# EAGLE board frond.withname (EAGLE 7.2.0)
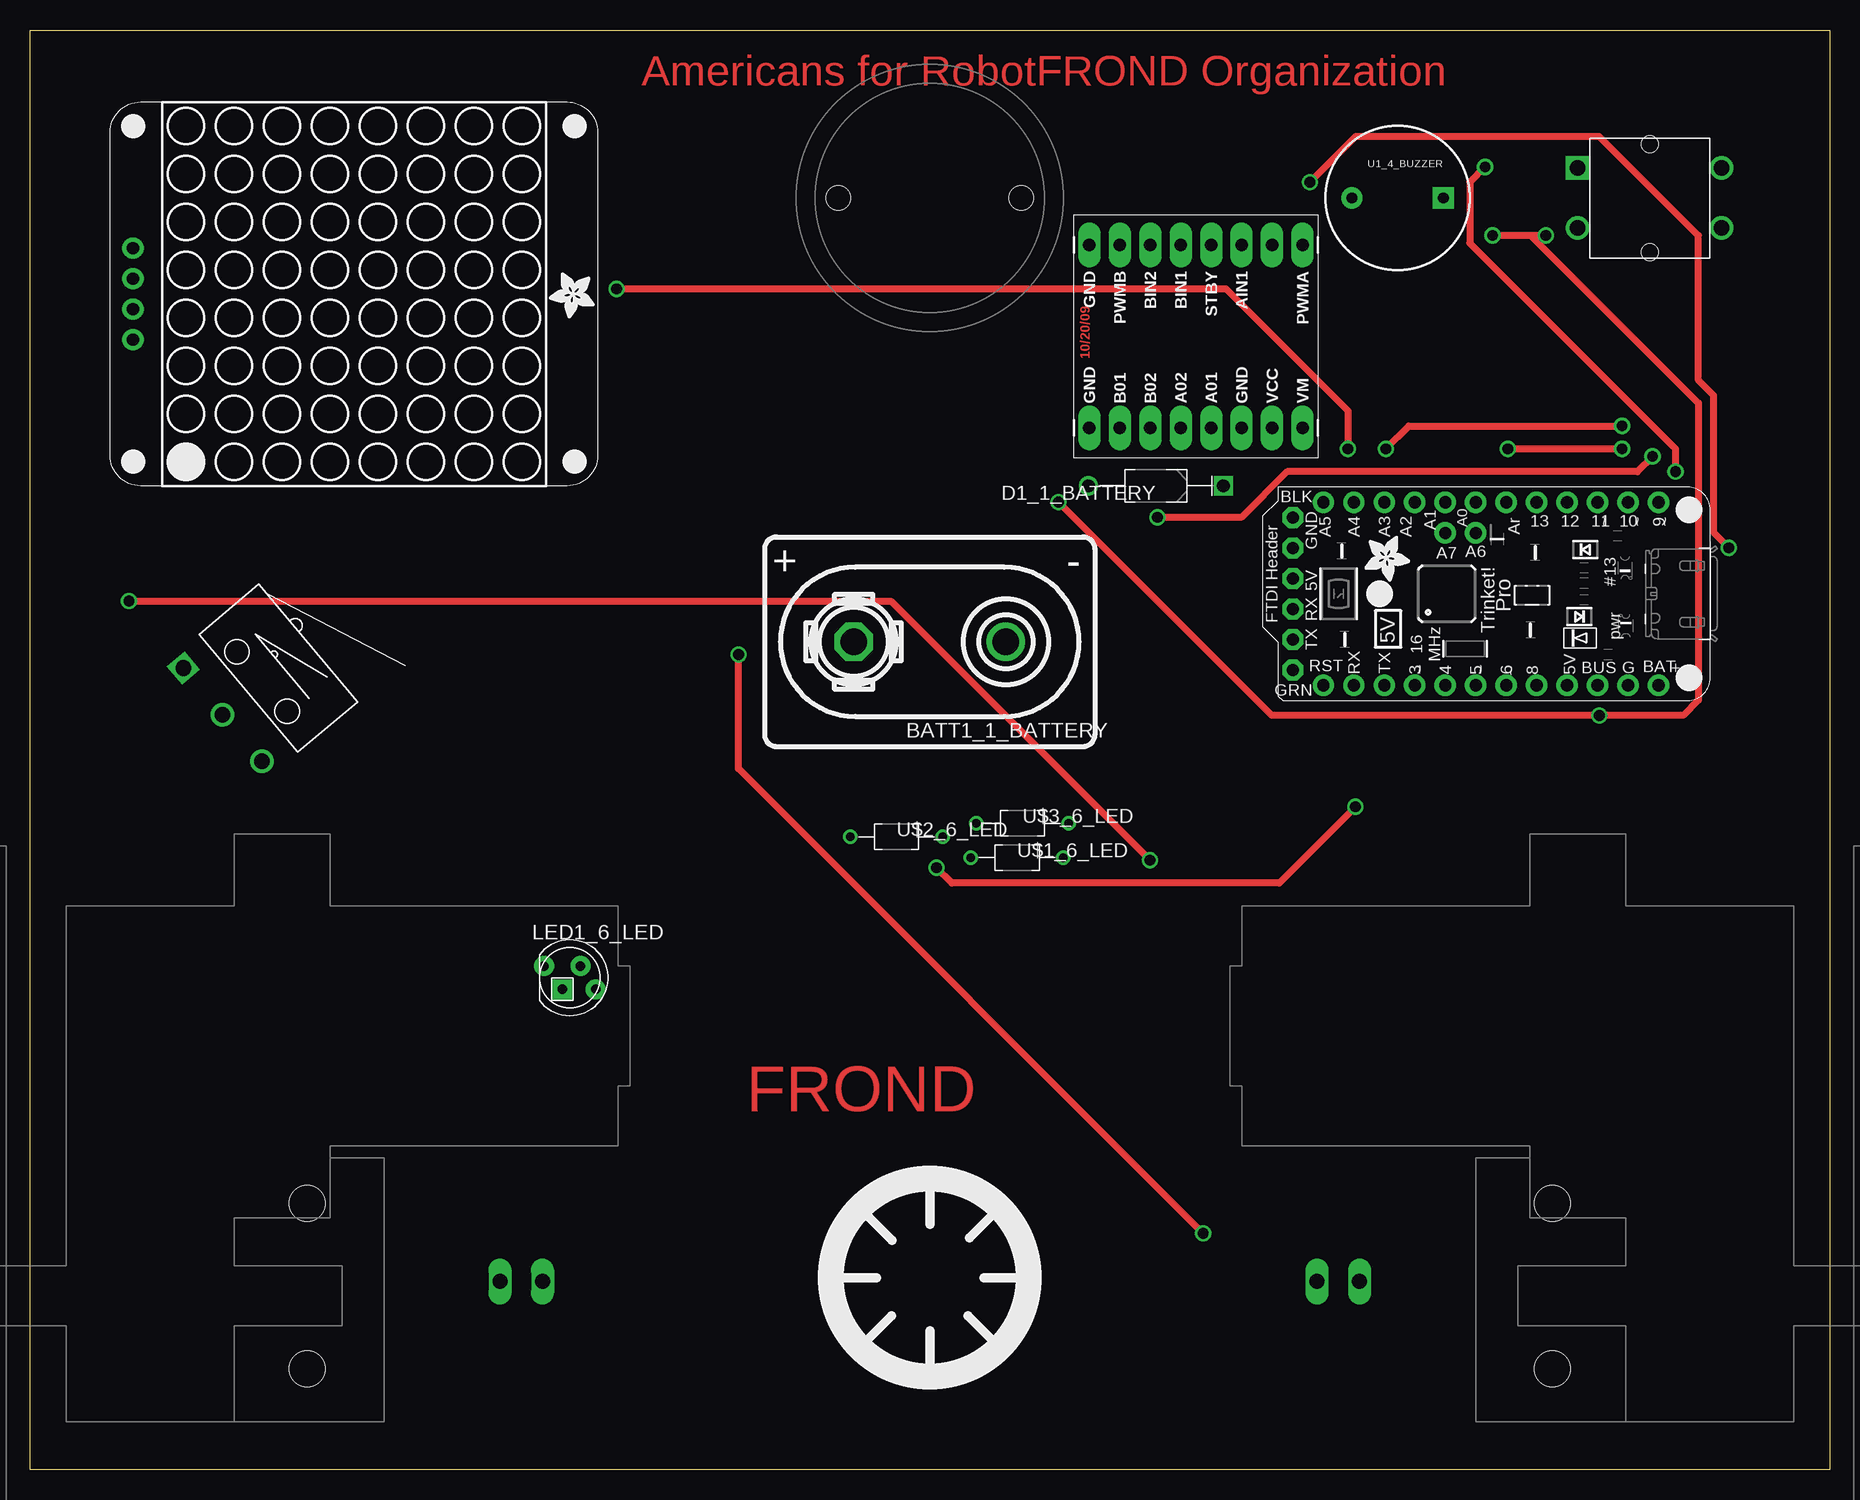
[diagram p0: board, top side]
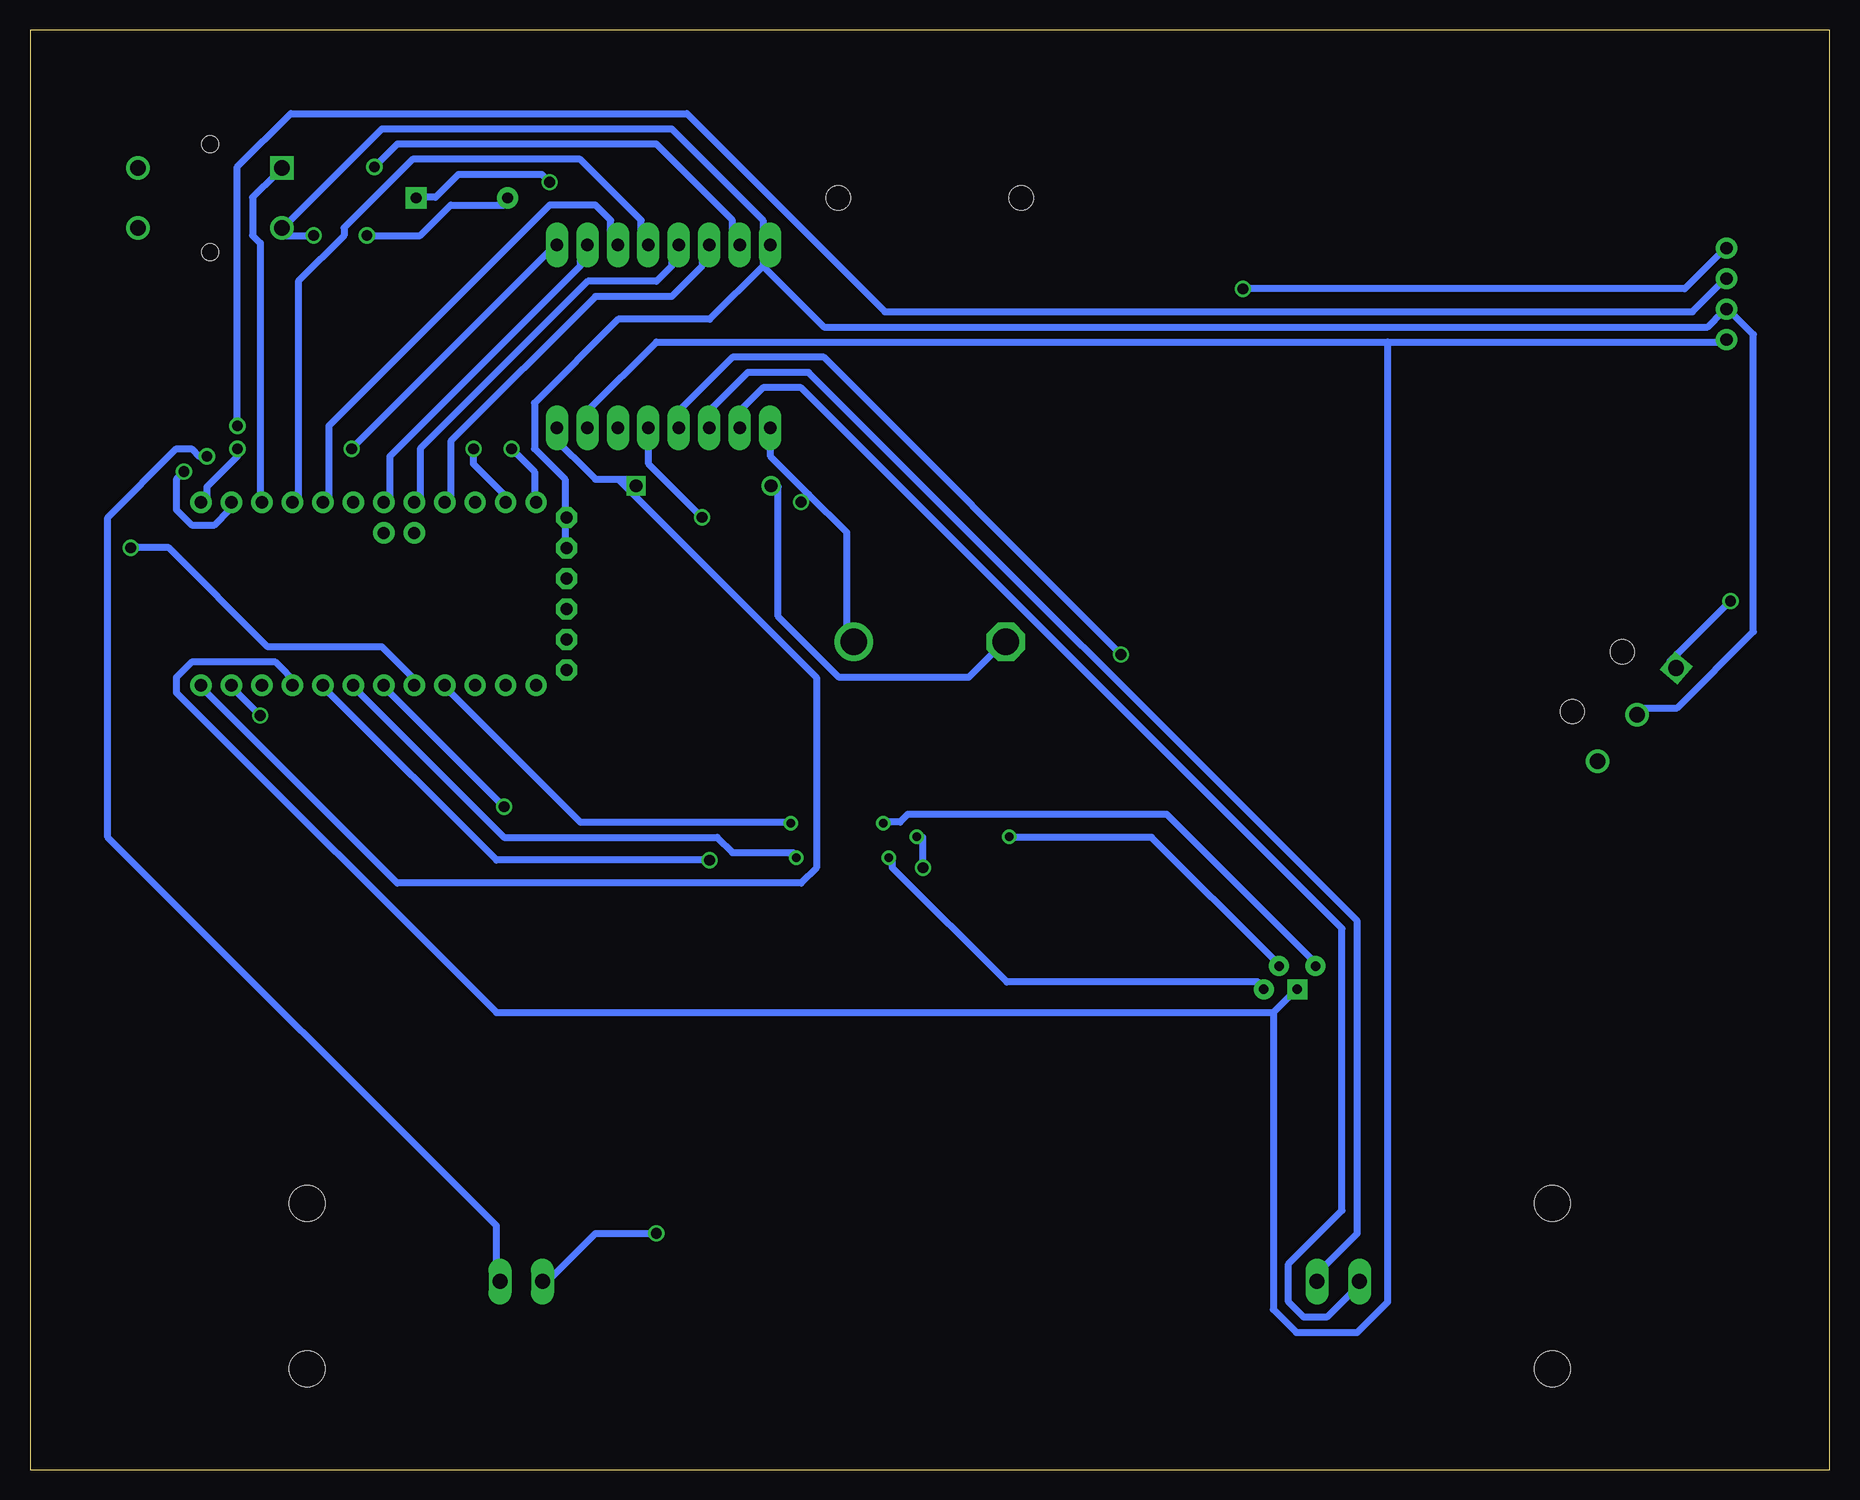
[diagram p1: board, bottom side, seen from below]

Size 150 x 120 mm. Coordinates in mm from the lower left corner, seen from the top.
Outline: 0,0 0,120 150,120 150,0 0,0
Copper layers (1*16): Top 0.035mm / dielectric 1.5mm / Bottom 0.035mm
Design rules "default": minimum track width 0.6mm, minimum drill 0.9mm, track to track 15mil, track to pad 0.6mm, pad to pad 0.5mm, via to via 0.38mm, smd to smd 8mil, copper to edge 40mil, drill to drill 8mil, minimum pad ring 10mil, minimum via ring 8mil, stop-mask expansion 4mil, vias tented up to drill 0mil, thermal gap 10mil
tRestrict: area 10.5,64.5 to 15.1,69.1; area 101.7,84.1 to 105.4,89.6; area 101.7,99.3 to 105.4,104.9; area 103.5,75 to 107.1,78.6; area 103.5,77.6 to 107.1,81.1; area 104.2,84.1 to 107.9,89.6; area 104.2,99.3 to 107.9,104.9; area 105.4,12.9 to 109.1,18.5; area 106,78.8 to 109.6,82.4; area 108.4,104.2 to 112,107.8; area 108.6,78.8 to 112.1,82.4; area 109,12.9 to 112.7,18.5; 51 more areas
vRestrict: area -10,-29 to 52,54.5; area 102.7,64.1 to 140.7,81.9; area 107.7,99.7 to 120.3,112.3; area 127.5,99 to 142.5,113; area 42,37.8 to 48.2,44.2; area 59.8,58.8 to 90.2,79.2; area 6,81.5 to 48,114.5; area 63.6,94.6 to 86.6,117.7; area 65.2,6.2 to 84.8,25.8; area 67.6,51.4 to 76.9,54.1; area 77.6,49.7 to 87,52.3; area 78.1,52.5 to 87.4,55.2; 4 more areas

## Footprints (pad centres in the part's own frame; a part is rotated, then mirrored left to right if it is on the bottom)
BUTTON-TACTILE-SQUARE-ADAFRUIT1010 = drill 1.3 square: P -6,2.5 | drill 1.3: P2 6,2.5; S -6,-2.5; S2 6,-2.5 | hole 1.4: 0,-4.5; 0,4.5
BATTERY_9V_KEYSTONE_968 = drill 2.2: N 6.35,0 | drill 2.2 octagon: P -6.35,0
DIOAD1125W78L520D270_HS = drill 1.06 pad 1.59: A 5.625,0 | drill 1.06 pad 1.59 square: C -5.625,0
SPARKFUN_DUAL_MOTOR_DRIVER = drill 1.016 pad 1.88 long: A01 7.62,1.27; A02 7.62,-1.27; AIN1 -7.62,3.81; AIN2 -7.62,6.35; B01 7.62,-6.35; B02 7.62,-3.81; BIN1 -7.62,-1.27; BIN2 -7.62,-3.81; GND -7.62,-8.89; GND1 7.62,3.81; GND2 7.62,-8.89; PWMA -7.62,8.89; PWMB -7.62,-6.35; STBY -7.62,1.27; VCC 7.62,6.35; VM 7.62,8.89
SOLARBOTICS_G2_LEFT = drill 1.27 long: + -41.18,-3.68; - -44.72,-3.68 | hole 3: -25.1,-10.2; -25.1,3.6
LED5MMRGB = drill 0.8 pad 1.676: 1 -2.159,0.968; 3 0.889,0.968; 4 2.159,-0.968 | drill 0.8 pad 1.676 square: 2 -0.635,-0.968
SOLARBOTICS_G2 = drill 1.27 long: + 41.18,-3.68; - 44.72,-3.68 | hole 3: 25.1,-10.2; 25.1,3.6
ADAFRUIT-PRO-TRINKET-5V = drill 1.016 pad 1.778: +5V 7.62,24.13; A0 -7.62,16.51; A1 -7.62,13.97; A2 -7.62,11.43; A3 -7.62,8.89; A4 -7.62,6.35; A5 -7.62,3.81; AREF -7.62,19.05; D3 7.62,11.43; D4 7.62,13.97; D5 7.62,16.51; D6 7.62,19.05; D8 7.62,21.59; D9 -7.62,31.75; D10 -7.62,29.21; D11 -7.62,26.67; D12 -7.62,24.13; D13 -7.62,21.59; GND2 7.62,29.21; RESET 7.62,3.81; RXD1 7.62,6.35; TXD1 7.62,8.89; VBAT 7.62,31.75; VBUS1 7.62,26.67 | drill 1 pad 1.778: A6 -5.08,16.51; A7 -5.08,13.97 | drill 1.016 pad 1.778 octagon: DTR/RTS 6.35,1.27; GND -6.35,1.27; GND1 -3.81,1.27; RXD 1.27,1.27; TXD 3.81,1.27; VBUS -1.27,1.27
ADAFRUIT-3/4IN-CASTER = hole 2: -7.62,0; 7.62,0
BUZZER-12MM = drill 0.9 pad 1.778 square: + 3.81,0 | drill 0.9 pad 1.778: - -3.81,0
ADAFRUIT-1.2IN-8X8-LED-BACKPACK = drill 1.016 pad 1.778: GND -18.415,-1.27; SCL -18.415,3.81; SDA -18.415,1.27; VDD -18.415,-3.81
RESAD770W45L370D210_HS = drill 0.7 pad 1.1: 1 -3.85,0; 2 3.85,0
BUMP_SWITCH_OMRON_D2FLA1 = drill 1.3 square: A -5.08,-2.8 | drill 1.3: B 0,-2.8; NC 5.08,-2.8 | hole 2: -3.25,1.5; 3.25,1.5

## Placement (x,y rotation side)
B1_7_BUTTON  BUTTON-TACTILE-SQUARE  [BUTTON-TACTILE-SQUARE-ADAFRUIT1010]  135,106 0 top
BATT1_1_BATTERY  BATTERY-9V-VERTICAL  [BATTERY_9V_KEYSTONE_968]  75,69 0 top
D1_1_BATTERY  [DIOAD1125W78L520D270_HS]  93.85,82 180 top
DRVR_9_DRIVE  SPARKFUN_DUAL_MOTOR_DRIVER-BOB  [SPARKFUN_DUAL_MOTOR_DRIVER]  97.19,94.46 270 top
L_9_DRIVE  SOLARBOTICS_GM2_LEFT  [SOLARBOTICS_G2_LEFT]  -2,12 180 top
LED1_6_LED  RGBLED_CA-5MM  [LED5MMRGB]  45,41 0 top
R_9_DRIVE  SOLARBOTICS_GM2  [SOLARBOTICS_G2]  152,12 180 top
U1_0_BRAIN  [ADAFRUIT-PRO-TRINKET-5V]  104,73 270 top
U1_2_CASTER  [ADAFRUIT-3/4IN-CASTER]  75,106 0 top
U1_3_PENHOLDER  [PENHOLDER]  75,16 0 top
U1_4_BUZZER  [BUZZER-12MM]  114,106 0 top
U1_8_DISPLAY_2  [ADAFRUIT-1.2IN-8X8-LED-BACKPACK]  27,98 0 top
U$1_6_LED  100  [RESAD770W45L370D210_HS]  82.28,51.01 0 top
U$2_5_BUMP  BUMP_SWITCH-MEDIUM-RIGHT  [BUMP_SWITCH_OMRON_D2FLA1]  18.2,64.72 310 top
U$2_6_LED  100  [RESAD770W45L370D210_HS]  72.23,52.75 0 top
U$3_6_LED  150  [RESAD770W45L370D210_HS]  82.73,53.87 0 top

## Library data of the parts
B1_7_BUTTON BATT1_1_BATTERY L_9_DRIVE R_9_DRIVE U1_2_CASTER U1_3_PENHOLDER U1_4_BUZZER U$2_5_BUMP = Components
D1_1_BATTERY = KoalaBuild; DATASHEET: http://www.st.com/web/en/resource/technical/document/datasheet/CD00001625.pdf; DB: /Users/sciencectn/Documents/nvsl/Gadgets/Tools/Koala/Koala/PartLibrary/Digikey/Schottky-Diodes-TH.csv; DEVICE: TH-DO-41-AND-DO-204AL; DIST: Digikey; DISTPN: 497-4547-1-ND; IMAGE: http://media.digikey.com/photos/STMicro%20Photos/1N5819.JPG; IRECT: 1A; MFR: STMicroelectronics; MIN_QTY: 1; MPN: 1N5817; PACKAGE: DIOAD1125W78L520D270_HS; PRICE: $0.57; SIZE: TH; STOCK: STOCK; VALUE: 450mV; VREV: 20V
DRVR_9_DRIVE U1_0_BRAIN U1_8_DISPLAY_2 = BOBs
LED1_6_LED = Components; CREATOR: Swanson
U$1_6_LED U$2_6_LED = KoalaBuild; CASE: TH; DATASHEET: http://www.yageo.com/NewPortal/yageodocoutput?fileName=/pdf/throughhole/Yageo_LR_CFR_2013.pdf; DB: /Users/sciencectn/Documents/nvsl/Gadgets/Tools/Koala/Koala/PartLibrary/Digikey/Resistors-TH.csv; DEVICE: TH-1/6W-CARBON; DIST: Digikey; DISTPN: 100EBK-ND; IMAGE: http://media.digikey.com/Renders/Yageo%20Renders/CFR-12JR-100R.jpg; MFR: Yageo; MIN_QTY: 1; MPN: CFR-12JB-52-100R; PACKAGE: RESAD770W45L370D210_HS; PRICE: $0.10; PWR: 167mW; SIZE: TH; STOCK: STOCK; TOL: 5%; VALUE_QUERY: 100
U$3_6_LED = KoalaBuild; CASE: TH; DATASHEET: http://www.yageo.com/NewPortal/yageodocoutput?fileName=/pdf/throughhole/Yageo_LR_CFR_2013.pdf; DB: /Users/sciencectn/Documents/nvsl/Gadgets/Tools/Koala/Koala/PartLibrary/Digikey/Resistors-TH.csv; DEVICE: TH-1/6W-CARBON; DIST: Digikey; DISTPN: 150EBK-ND; IMAGE: http://media.digikey.com/Renders/Yageo%20Renders/CFR-12JR-150R.jpg; MFR: Yageo; MIN_QTY: 1; MPN: CFR-12JB-52-150R; PACKAGE: RESAD770W45L370D210_HS; PRICE: $0.10; PWR: 167mW; SIZE: TH; STOCK: STOCK; TOL: 5%; VALUE_QUERY: 150

## Nets
+5V_0_BRAIN: DRVR_9_DRIVE.VCC LED1_6_LED.2 U1_0_BRAIN.+5V U1_8_DISPLAY_2.VDD
A0_0_BRAIN: DRVR_9_DRIVE.AIN2 U1_0_BRAIN.A0
A1_0_BRAIN: DRVR_9_DRIVE.BIN1 U1_0_BRAIN.A1
A01_9_DRIVE: DRVR_9_DRIVE.A01 R_9_DRIVE.+
A2_0_BRAIN: DRVR_9_DRIVE.BIN2 U1_0_BRAIN.A2
A02_9_DRIVE: DRVR_9_DRIVE.A02 R_9_DRIVE.-
A3_0_BRAIN: U1_0_BRAIN.A3
A4_0_BRAIN: U1_0_BRAIN.A4 U1_8_DISPLAY_2.SDA
A5_0_BRAIN: U1_0_BRAIN.A5 U1_8_DISPLAY_2.SCL
A6_0_BRAIN: U1_0_BRAIN.A6
A7_0_BRAIN: U1_0_BRAIN.A7
AREF_0_BRAIN: U1_0_BRAIN.AREF
B01_9_DRIVE: DRVR_9_DRIVE.B01 L_9_DRIVE.+
B02_9_DRIVE: DRVR_9_DRIVE.B02 L_9_DRIVE.-
D3_0_BRAIN: U1_0_BRAIN.D3 U$3_6_LED.2
D4_0_BRAIN: U1_0_BRAIN.D4 U1_4_BUZZER.+
D5_0_BRAIN: U1_0_BRAIN.D5 U$2_6_LED.2
D6_0_BRAIN: U1_0_BRAIN.D6 U$1_6_LED.2
D8_0_BRAIN: U1_0_BRAIN.D8 U$2_5_BUMP.A
D9_0_BRAIN: DRVR_9_DRIVE.PWMA U1_0_BRAIN.D9
D10_0_BRAIN: DRVR_9_DRIVE.PWMB U1_0_BRAIN.D10
D11_0_BRAIN: B1_7_BUTTON.P U1_0_BRAIN.D11
D12_0_BRAIN: DRVR_9_DRIVE.STBY U1_0_BRAIN.D12
D13_0_BRAIN: DRVR_9_DRIVE.AIN1 U1_0_BRAIN.D13
DTR/RTS_0_BRAIN: U1_0_BRAIN.DTR/RTS
GND1_9_DRIVE: DRVR_9_DRIVE.GND1
GND2_0_BRAIN: B1_7_BUTTON.S BATT1_1_BATTERY.N DRVR_9_DRIVE.GND DRVR_9_DRIVE.GND2 U1_0_BRAIN.GND U1_0_BRAIN.GND1 U1_0_BRAIN.GND2 U1_4_BUZZER.- U1_8_DISPLAY_2.GND U$2_5_BUMP.B
N$1_1_BATTERY: BATT1_1_BATTERY.P D1_1_BATTERY.A
N$1_6_LED: LED1_6_LED.4 U$1_6_LED.1
N$2_6_LED: LED1_6_LED.3 U$2_6_LED.1
N$3_6_LED: LED1_6_LED.1 U$3_6_LED.1
RESET_0_BRAIN: U1_0_BRAIN.RESET
RXD1_0_BRAIN: U1_0_BRAIN.RXD1
RXD_0_BRAIN: U1_0_BRAIN.RXD
TXD1_0_BRAIN: U1_0_BRAIN.TXD1
TXD_0_BRAIN: U1_0_BRAIN.TXD
VBUS1_0_BRAIN: U1_0_BRAIN.VBUS1
VBUS_0_BRAIN: U1_0_BRAIN.VBUS
VM_9_DRIVE: D1_1_BATTERY.C DRVR_9_DRIVE.VM U1_0_BRAIN.VBAT

## Tracks (layer width: path | path; a pad name or v marks a point on that pad's centre or on a via)
+5V_0_BRAIN
  Bottom 0.6: DRVR_9_DRIVE.VCC 103.5,87 103.5,88.27 97.79,93.98 36.83,93.98 | 46.35,38.1 111.12,38.1 137.79,64.77 137.79,66.04 136.53,67.31 129.54,67.31 127.64,65.41 U1_0_BRAIN.+5V | 36.83,93.98 36.83,13.97 39.37,11.43 44.45,11.43 46.35,13.34 46.35,38.1 | 36.83,93.98 8.89,93.98 U1_8_DISPLAY_2.VDD | LED1_6_LED.2 44.45,40.01 46.35,38.1
A0_0_BRAIN
  Bottom 0.6: DRVR_9_DRIVE.AIN2 104.14,101.6 104.14,100.33 120.02,84.45 120.02,80.64 U1_0_BRAIN.A0
A1_0_BRAIN
  Bottom 0.6: U1_0_BRAIN.A1 117.47,80.64 117.47,85.09 103.5,99.06 97.79,99.06 96.52,100.33 96.52,101.6 DRVR_9_DRIVE.BIN1
A01_9_DRIVE  (via drill 0.9)
  Top 0.6: v93.98,79.38 100.97,79.38 104.78,83.19 133.99,83.19 v135.25,84.45
  Bottom 0.6: R_9_DRIVE.+ 111.12,15.88 111.12,20.32 143.51,52.7 143.51,79.38 137.79,85.09 136.53,85.09 135.89,84.45 v135.25,84.45 | v93.98,79.38 98.42,83.82 98.42,86.36 DRVR_9_DRIVE.A01
A2_0_BRAIN
  Bottom 0.6: U1_0_BRAIN.A2 114.94,80.64 114.94,85.72 102.87,97.79 96.52,97.79 93.98,100.33 93.98,101.6 DRVR_9_DRIVE.BIN2
A02_9_DRIVE  (via drill 0.9)
  Top 0.6: v59.05,67.94 59.05,58.42 v97.79,19.68
  Bottom 0.6: v97.79,19.68 102.87,19.68 106.68,15.88 R_9_DRIVE.- | v59.05,67.94 83.82,92.71 91.44,92.71 95.89,88.27 95.89,87 DRVR_9_DRIVE.A02
A4_0_BRAIN  (via drill 0.9)
  Top 0.6: v113.03,85.09 114.94,87 v132.72,87
  Bottom 0.6: U1_0_BRAIN.A4 109.86,80.64 113.03,83.82 v113.03,85.09 | v132.72,87 132.72,108.58 128.27,113.03 95.25,113.03 78.74,96.52 11.43,96.52 8.89,99.06 U1_8_DISPLAY_2.SDA
A5_0_BRAIN  (via drill 0.9)
  Top 0.6: v109.86,85.09 109.86,88.27 99.69,98.42 v48.9,98.42
  Bottom 0.6: U1_0_BRAIN.A5 107.95,80.64 107.95,83.19 v109.86,85.09 | v48.9,98.42 12.06,98.42 8.89,101.6 U1_8_DISPLAY_2.SCL
B01_9_DRIVE
  Bottom 0.6: L_9_DRIVE.+ 39.37,15.24 41.91,12.7 43.81,12.7 45.09,13.97 45.09,17.14 40.64,21.59 40.64,45.09 85.72,90.17 88.9,90.17 90.81,88.27 90.81,87 DRVR_9_DRIVE.B01
B02_9_DRIVE
  Bottom 0.6: L_9_DRIVE.- 43.18,15.88 39.37,19.68 39.37,45.72 85.09,91.44 90.17,91.44 93.34,88.27 93.34,87 DRVR_9_DRIVE.B02
D3_0_BRAIN
  Bottom 0.6: U1_0_BRAIN.D3 114.94,64.77 104.14,53.98 87,53.98 U$3_6_LED.2
D4_0_BRAIN  (via drill 0.9)
  Top 0.6: v106.68,107.31 110.49,111.12 130.81,111.12 139.06,102.87 139.06,90.81 140.34,89.53 140.34,78.11 v141.6,76.83
  Bottom 0.6: v106.68,107.31 107.31,107.95 114.3,107.95 116.2,106.05 117.47,106.05 U1_4_BUZZER.+ | U1_0_BRAIN.D4 117.47,65.41 120.65,68.58 130.18,68.58 138.43,76.83 v141.6,76.83
D5_0_BRAIN  (via drill 0.9)
  Top 0.6: v110.49,55.24 104.14,48.9 76.83,48.9 v75.56,50.16
  Bottom 0.6: v110.49,55.24 120.02,64.77 U1_0_BRAIN.D5 | v75.56,50.16 75.56,52.7 U$2_6_LED.2
D6_0_BRAIN
  Bottom 0.6: U1_0_BRAIN.D6 122.56,64.77 110.49,52.7 92.71,52.7 91.44,51.44 86.36,51.44 U$1_6_LED.2
D8_0_BRAIN  (via drill 0.9)
  Top 0.6: v93.34,50.8 71.75,72.39 v8.26,72.39
  Bottom 0.6: U1_0_BRAIN.D8 125.09,64.77 111.12,50.8 v93.34,50.8 | U$2_5_BUMP.A 13.34,67.31 v8.26,72.39
D9_0_BRAIN  (via drill 0.9)
  Top 0.6: v123.19,85.09 v132.72,85.09
  Bottom 0.6: DRVR_9_DRIVE.PWMA 106.68,101.6 v123.19,85.09 | v132.72,85.09 132.72,84.45 135.25,81.92 135.25,80.64 U1_0_BRAIN.D9
D10_0_BRAIN  (via drill 0.9)
  Top 0.6: v121.28,108.58 120.02,107.31 120.02,102.23 137.16,85.09 v137.16,83.19
  Bottom 0.6: v121.28,108.58 119.38,110.49 97.79,110.49 91.44,104.14 91.44,102.23 DRVR_9_DRIVE.PWMB | U1_0_BRAIN.D10 133.35,80.01 134.62,78.74 136.53,78.74 137.79,80.01 137.79,82.55 v137.16,83.19
D11_0_BRAIN
  Bottom 0.6: B1_7_BUTTON.P 129.54,107.95 131.44,106.05 131.44,102.87 130.81,102.23 130.81,80.64 U1_0_BRAIN.D11
D12_0_BRAIN
  Bottom 0.6: U1_0_BRAIN.D12 127.64,80.64 127.64,99.06 123.83,102.87 123.83,103.5 118.11,109.22 104.14,109.22 99.06,104.14 99.06,102.23 DRVR_9_DRIVE.STBY
D13_0_BRAIN
  Bottom 0.6: DRVR_9_DRIVE.AIN1 101.6,102.23 101.6,104.14 102.87,105.41 106.68,105.41 125.09,87 125.09,80.64 U1_0_BRAIN.D13
GND2_0_BRAIN  (via drill 0.9)
  Top 0.6: v85.72,80.64 103.5,62.87 v130.81,62.87 137.79,62.87 139.06,64.14 139.06,88.9 125.09,102.87 | 125.09,102.87 v121.92,102.87 | v126.36,102.87 125.09,102.87
  Bottom 0.6: U1_0_BRAIN.GND1 105.41,76.83 105.41,78.74 U1_0_BRAIN.GND 105.41,79.38 105.41,82.55 107.95,85.09 107.95,88.9 100.97,95.89 93.34,95.89 88.9,100.33 | U1_4_BUZZER.- 110.49,105.41 114.94,105.41 117.47,102.87 v121.92,102.87 | v126.36,102.87 128.91,102.87 B1_7_BUTTON.S 128.91,103.5 120.65,111.76 96.52,111.76 88.9,104.14 88.9,102.23 DRVR_9_DRIVE.GND 88.9,101.6 88.9,100.33 | v130.81,62.87 132.72,64.77 U1_0_BRAIN.GND2 | U$2_5_BUMP.B 15.88,63.5 12.7,63.5 6.35,69.85 6.35,94.61 8.26,96.52 U1_8_DISPLAY_2.GND 8.89,96.52 10.16,95.25 83.82,95.25 88.9,100.33 | BATT1_1_BATTERY.N 81.92,69.22 81.92,78.11 85.09,81.28 | 85.09,81.28 88.27,84.45 88.27,86.36 DRVR_9_DRIVE.GND2 | v85.72,80.64 85.09,81.28
N$1_1_BATTERY
  Bottom 0.6: BATT1_1_BATTERY.P 69.22,68.58 71.75,66.04 82.55,66.04 87.63,71.12 87.63,81.92 D1_1_BATTERY.A
N$1_6_LED
  Bottom 0.6: LED1_6_LED.4 47.62,40.64 68.58,40.64 78.11,50.16 78.11,50.8 U$1_6_LED.1
N$2_6_LED
  Bottom 0.6: LED1_6_LED.3 46.35,42.55 56.52,52.7 67.94,52.7 U$2_6_LED.1
N$3_6_LED
  Bottom 0.6: LED1_6_LED.1 43.18,42.55 55.24,54.61 76.83,54.61 77.47,53.98 78.74,53.98 U$3_6_LED.1
VM_9_DRIVE
  Bottom 0.6: 100.97,82.55 84.45,66.04 84.45,50.16 85.72,48.9 119.38,48.9 135.25,64.77 U1_0_BRAIN.VBAT | 100.97,82.55 99.69,82.55 D1_1_BATTERY.C | 100.97,82.55 102.87,82.55 106.68,86.36 DRVR_9_DRIVE.VM

## Text on the board
Top: Americans for RobotFROND Organization | FROND